# Altium PCB Constant Current Load V200.PcbDoc
Units mil, origin at the board's own origin, x right, y up, seen from the top; angles counter-clockwise.
Board outline 3149.61 x 1929.13 mil, 2 copper layers (Top Layer, Bottom Layer); 31 components, 18 nets, 87 pads, 7 vias.
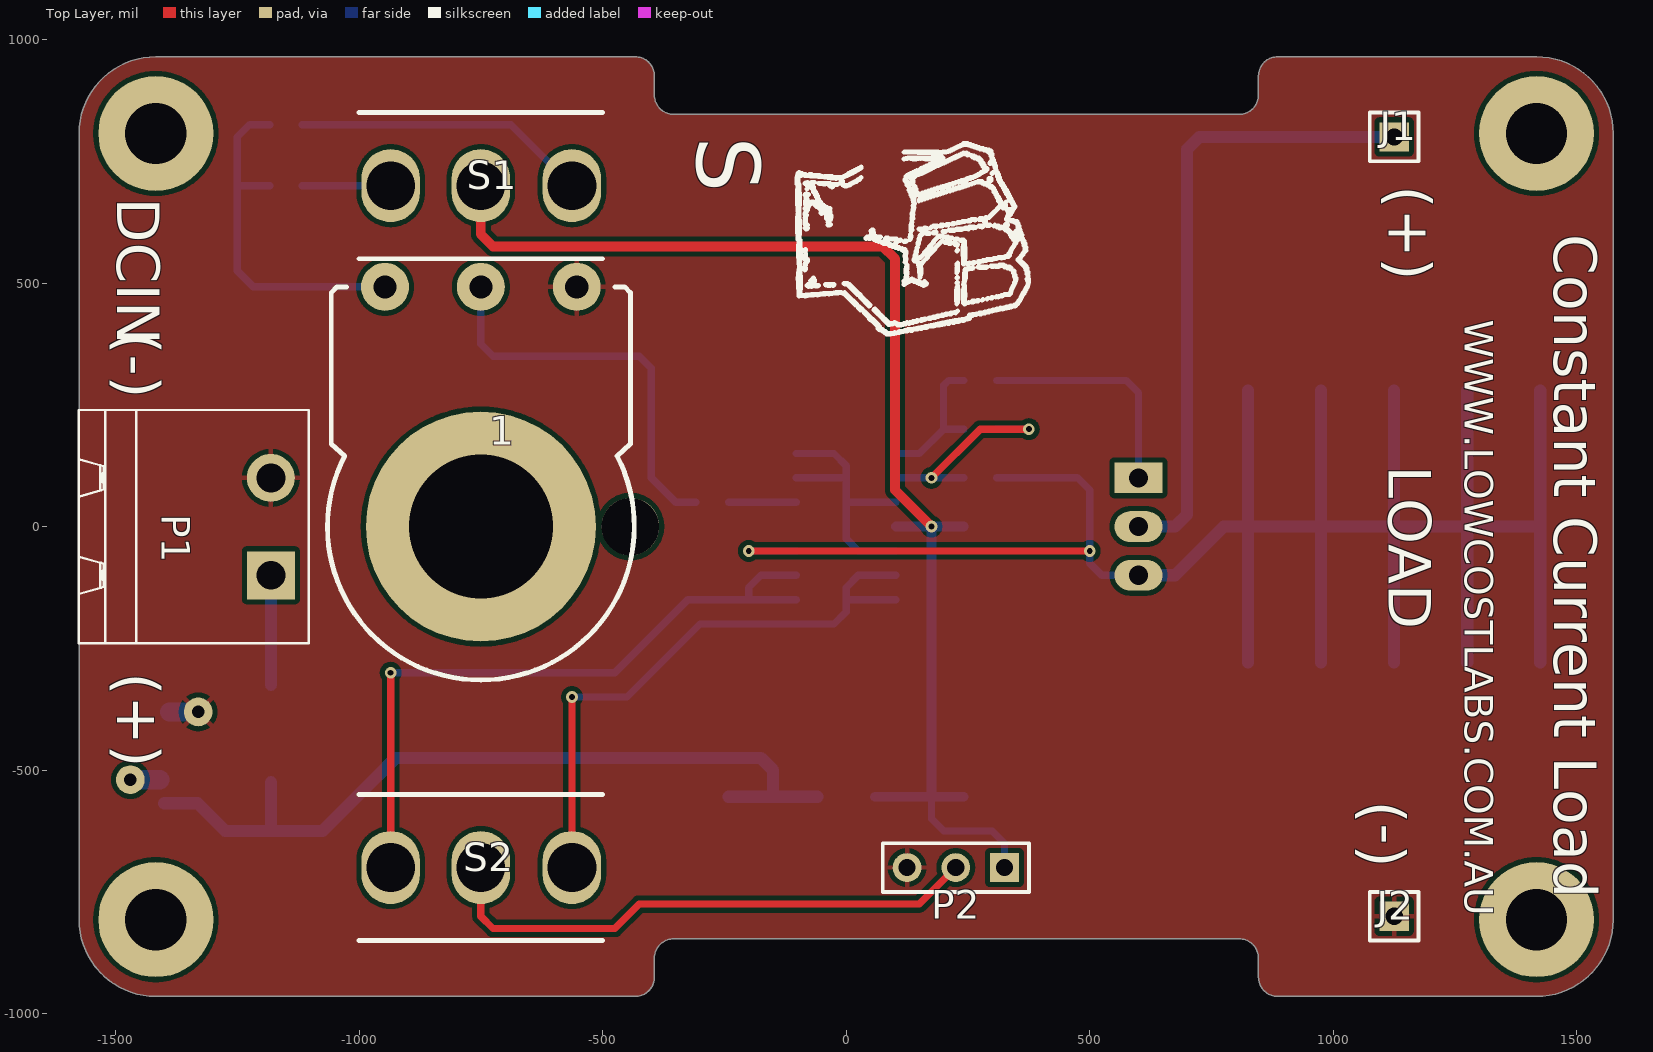
[diagram p0: Top Layer view]
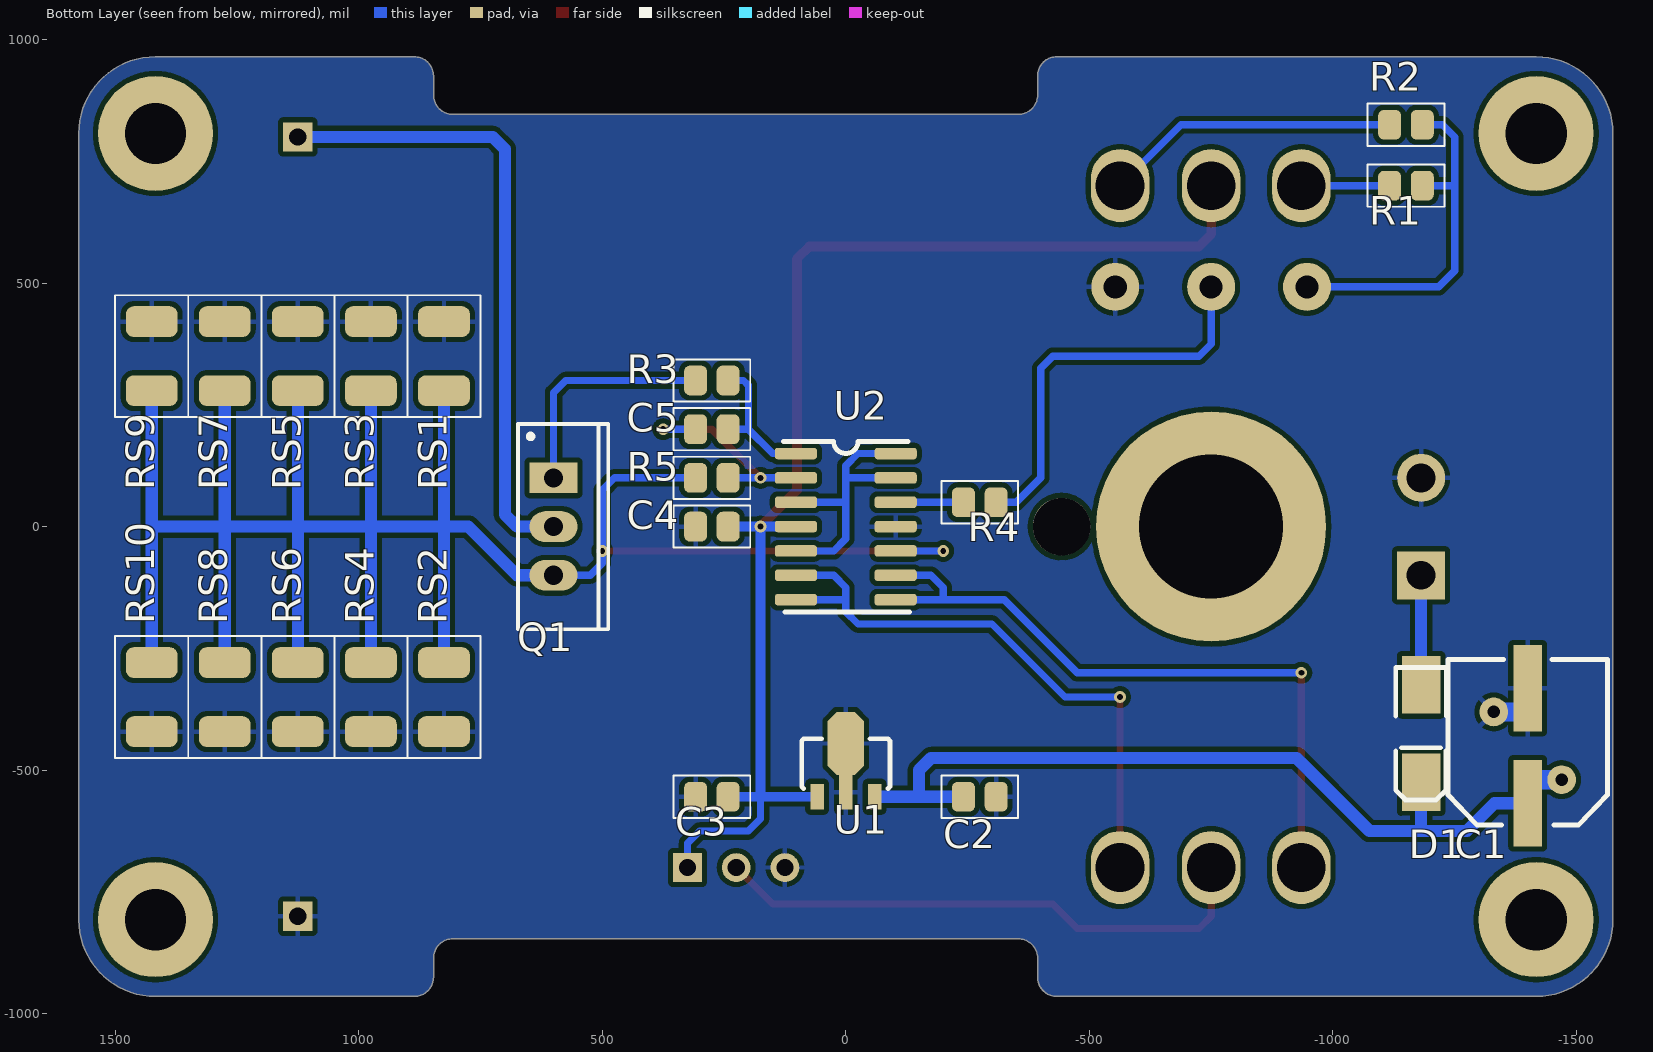
[diagram p1: Bottom Layer view, seen from below]

## Layer stack, top to bottom
Top Solder: solder mask 0.4, Solder Resist, Dk 3.5
Top Layer: signal copper 1.4
Dielectric1: dielectric 12.6, FR-4, Dk 4.8
Bottom Layer: signal copper 1.4
Bottom Solder: solder mask 0.4, Solder Resist, Dk 3.5

## Board outline
-1417.32,-964.57 -433.07,-964.57 ccw(c-433.07,-925.2) -393.7,-925.2 -393.7,-885.83 cw(c-354.33,-885.83) -354.33,-846.46 807.09,-846.46 cw(c807.09,-885.83) 846.46,-885.83 846.46,-925.2 ccw(c885.83,-925.2) 885.83,-964.57 1417.32,-964.57 ccw(c1417.32,-807.09) 1574.8,-807.09 1574.8,807.09 ccw(c1417.32,807.09) 1417.32,964.57 885.83,964.57 ccw(c885.83,925.2) 846.46,925.2 846.46,885.83 cw(c807.09,885.83) 807.09,846.46 -354.33,846.46 cw(c-354.33,885.83) -393.7,885.83 -393.7,925.2 ccw(c-433.07,925.2) -433.07,964.57 -1417.32,964.57 ccw(c-1417.32,807.09) -1574.8,807.09 -1574.8,-807.09 ccw(c-1417.32,-807.09)

## Design rules (kind name [scope] priority, off if disabled: settings)
Clearance [All] p1: gap=10 ignorepadtopadclearanceinfootprint=FALSE except(0: Arc-Hole Track-Hole SMDPad-Hole THPad-Hole Via-Hole Fill-Hole Poly-Hole Region-Hole Text-Hole)
PolygonConnect [All] p1: connectstyle=Relief reliefconductorwidth=10 reliefentries=4 polygonreliefangle="90 Angle" airgapwidth=10
RoomDefinition "Constant Current" [InComponentClass('Constant Current')] p1: confinementstyle=ConfineIn formatcopy=TRUE lockcomponents=FALSE outline -1574.8,-964.57 1574.8,-964.57 1574.8,964.57 -1574.8,964.57
RoutingVias [All] p1: holewidth=12 width=24 viastyle="Through Hole" minholewidth=12 minwidth=24 maxholewidth=28 maxwidth=50
SolderMaskExpansion [All] p1: expansion=4
Width [All] p1: maxlimit=100 minlimit=10 preferedwidth=10
30 further rules are at their usual default settings.

## Components (designator, comment, footprint, x,y, rotation, side; value= is the part's Value field where it differs from the comment)
1 "I ADJUST" "PCB POT 17MM" -750,0 r180 top
C1 "10uF" "CAP E CASE" -1400,-450 r270 bottom
C2 "100nF" "CAP 0805" -275,-554.63 r180 bottom
C3 "100nF" "CAP 0805" 275,-554.62 r0 bottom
C4 "100nF" "CAP 0805" 275,0 r180 bottom
C5 "100nF" "CAP 0805" 275,200 r0 bottom
D1 "S1M" DO-214AC -1181.1,-425 r270 bottom
J1 "Socket" TP 1125,800 r0 top
J2 "Socket" TP 1125,-800 r0 top
P1 "PSU IN" "5.08mm HEADER 2 Way RA- With Socket" -1181.1,-100 r90 top
P2 "Header 3" HDR1X3 325,-700 r180 top
Q1 "MTP3055" TO-220AB 600,0 r270 bottom
R1 "0805" "RES 0805" -1150,700 r180 bottom value=10k
R2 "0805" "RES 0805" -1150,825 r180 bottom value=90k
R3 "0805" "RES 0805" 275,300 r0 bottom value=100R
R4 "0805" "RES 0805" -275,50 r0 bottom value=100R
R5 "0805" "RES 0805" 275,100 r0 bottom value=10k
RS1 "0805" "RES 1210" 825,350 r270 bottom value=10R
RS2 "0805" "RES 1210" 825,-350 r270 bottom value=10R
RS3 "0805" "RES 1210" 975,350 r270 bottom value=10R
RS4 "0805" "RES 1210" 975,-350 r270 bottom value=10R
RS5 "0805" "RES 1210" 1125,350 r270 bottom value=10R
RS6 "0805" "RES 1210" 1125,-350 r270 bottom value=10R
RS7 "0805" "RES 1210" 1275,350 r270 bottom value=10R
RS8 "0805" "RES 1210" 1275,-350 r270 bottom value=10R
RS9 "0805" "RES 1210" 1425,350 r270 bottom value=10R
RS10 "0805" "RES 1210" 1425,-350 r270 bottom value=10R
S1 "SW-SPDT" "SPDT MINI TOGGLE (BOARD MOUNT)" -750,700 r270 top
S2 "SW-SPDT" "SPDT MINI TOGGLE (BOARD MOUNT)" -750,-700 r270 top
U1 "MC7805ACT" SOT89 0,-500 r180 bottom value=LM7805ACT
U2 "LM324AN" SOIC-14 0,0 r270 bottom value=LM324

## Footprints (in the part's own frame and the unit in brackets; to place one, negate y for a bottom-side part, rotate by r counter-clockwise, add the part's x,y. Pads: shape width x height; smd on the part's side, far side on the other; paste and mask are expansions set on the pad)
"5.08mm HEADER 2 Way RA- With Socket" [mm] "PHOENIX CONTACT 1757019 & 1759017"
  rect 2.5x2.5 hole 1.5: 1(0,0)
  round 2.5 hole 1.5: 2(5.08,0)
  silkscreen extent -3.54,-1.98 8.62,10.02, body extent -2.54,-2.01 7.67,19.18, height 15.02
"CAP 0805" [mm]
  rrect50% 1.2x1.55 smd: 1(-0.85,0) 2(0.85,0)
  silkscreen extent -2,-1.1 2,1.1, body extent -1.25,-0.62 1.25,0.62, height 0.8
"CAP E CASE" [mm]
  round 1.5 hole 0.65: 1(1.768,1.768) 2(-1.768,-1.768)
  rect 4.5x1.5 smd: 1(3,0) 2(-3,0)
  Top Layer lines w1: 1.768,1.768 1.768,0.232 ; -1.768,-0.268 -1.768,-1.768
  silkscreen extent -4.5,-4.15 4.13,4.15, body extent -4.5,-4.15 4.5,4.15, height 6.2
DO-214AC [mm]
  rect 3x2 smd: 1(-2.54,0) 2(2.54,0)
  silkscreen extent -3.45,-1.32 3.45,1.32, body extent -2,-1 2,1, height 1.55
HDR1X3 [mm] "Connector; Header; 3 Position"
  rect 1.5x1.5 hole 0.9: 1(0,0)
  round 1.5 hole 0.9: 2(2.54,0) 3(5.08,0)
  silkscreen extent -1.27,-1.27 6.35,1.27
"PCB POT 17MM" [mm]
  round 2.5 hole 1.2: 1(-5,-12.5) 2(0,-12.5) 3(5,-12.5)
  round 3 hole 3: 4(-7.8,0)
  round 12 hole 7.5: MOUNT(0,0)
  silkscreen extent -8,-12.5 8,8, body extent -7.87,-17 7.88,7.62, height 6.87
"RES 0805" [mm]
  rrect50% 1.2x1.55 smd: 1(-0.85,0) 2(0.85,0)
  silkscreen extent -2,-1.1 2,1.1, body extent -1.25,-0.62 1.25,0.62, height 0.8
"RES 1210" [mm]
  rrect50% 1.6x2.7 smd: 1(-1.8,0) 2(1.8,0)
  silkscreen extent -3.18,-1.91 3.18,1.91, body extent -2,-1.24 2,1.24, height 1.72
SOIC-14 [mm] "SOIC-14  NARROW BODY"
  rrect50% 0.6x2.2 smd: 1(-3.81,-2.6) 2(-2.54,-2.6) 3(-1.27,-2.6) 4(0,-2.6) 5(1.27,-2.6) 6(2.54,-2.6) 7(3.81,-2.6) 8(3.81,2.6) 9(2.54,2.6) 10(1.27,2.6) 11(0,2.6) 12(-1.27,2.6) 13(-2.54,2.6) 14(-3.81,2.6)
  silkscreen extent -4.45,-3.25 4.45,3.33, body extent -4.4,-3 4.4,3, height 1.7
SOT89 [mm]
  rect 0.7x1.35 smd: 1(1.5,-1.388) 3(-1.5,-1.388)
  rect 0.7x1.8 smd: 2(0,-1.163)
  oct 1.9x3.3 smd: 2(0,1.388)
  silkscreen extent -2.3,-0.97 2.3,1.63, body extent -2.3,-1.91 2.3,2.34, height 1.62
"SPDT MINI TOGGLE (BOARD MOUNT)" [mil]
  oval 150x120 hole 100: 1(0,187) 2(0,0) 3(0,-185.26)
  silkscreen extent -150,-250 150,250, body extent -157,-260 157,260, height 1296
TO-220AB [mm] "TO, Thru-Hole, Vertical, Heatsink Mounted; 3 In-Line Leads; Pitch 2.54 mm"
  rect 1.6x2.5 hole 1: 1(-2.54,0)
  oval 1.6x2.5 hole 1: 2(0,0) 3(2.54,0)
  silkscreen extent -5.35,-1.85 5.35,2.85, body extent -5.4,-1.9 5.4,2.9, height 19.3
TP [mil] "Connector; Header; 2 Position"
  rect 60x60 hole 35.43: 1(0,0)
  silkscreen extent -50,-50 50,50

## Part data
1: library part "Header 3", "Header, 3-Pin", LatestRevisionDate=17-Jul-2002, LatestRevisionNote="Re-released for DXP Platform.", Publisher="Altium Limited"
C1: library part "Cap Pol1", "Polarized Capacitor (Radial)"
C2 C3: library part CAP, "CAPACITOR SMD 0603", Manufacturer=Murata, Manufacturer Part No.=GCM188R71C104KA37D, Mouser Part no.=81-GCM188R71C104KA7D, Web link=http://au.mouser.com/ProductDetail/Murata/GCM188R71C104KA37D/?qs=aEuGZpxfbxWKAxwYn%252beTMg%3d%3d
C4 C5: library part Cap, "Capacitor", Manufacturer=YAEGO, Manufacturer Part No.=CC0603ZRY5V9BB104, Mouser Part no.=603-C0603ZRY5V9BB104, Supplier 1=Mouser, Supplier 2=Digi-Key, Supplier Part Number 1=603-C0603ZRY5V9BB104, Supplier Part Number 2=311-1343-2-ND, Web link=http://au.mouser.com/ProductDetail/Yageo/CC0603ZRY5V9BB104/?qs=AgBp2OyFlx%252bk1xe0tOfw5lSGBXIDidlPHbEeepmuVSw%3d
D1: library part DIODE, "DIODE, POWER", Manufacturer="Taiwan Semiconductor", Mouser Part no.=821-S1M, Manufacturer Part No.=S1M, Web link=http://au.mouser.com/ProductDetail/Taiwan-Semiconductor/S1M/?qs=sGAEpiMZZMtEwUVCuofpuOlSmRjzJonf%252bmrIm0%252bGbjE%3d
P1: library part "Header 2", "Header, 2-Pin", LatestRevisionDate=17-Jul-2002, LatestRevisionNote="Re-released for DXP Platform.", Publisher="Altium Limited"
P2: "Header, 3-Pin", LatestRevisionDate=17-Jul-2002, LatestRevisionNote="Re-released for DXP Platform.", Publisher="Altium Limited"
Q1: library part MOSFET-N4, "N-Channel MOSFET"
R1 R2 R3 R4 R5 RS1 RS2 RS3 RS4 RS5 RS6 RS7 RS8 RS9 RS10: library part Res2, "Resistor"
S1 S2: "SPDT Subminiature Toggle Switch, Right Angle Mounting, Vertical Actuation", ComponentLink1Description="Manufacturer Link", ComponentLink1URL=http://www.apem.com, DatasheetVersion=05-Dec-2000, LatestRevisionDate=17-Dec-2003, LatestRevisionNote="Schematic revised, PCB Footprint replaced.", PackageDescription="Switch; 4 Leads", PackageReference=TL36WW15050, Published=24-Mar-1999, Publisher="Altium Limited"
U1: "3-Terminal Positive Fixed Voltage Regulator", Manufacturer="Fairchild Semiconductor", Manufacturer Part No.=LM7805ACT, Mouser Part no.=512-LM7805ACT, Web link=http://au.mouser.com/ProductDetail/Fairchild-Semiconductor/LM7805ACT/?qs=VOMQJJE%252bBNlQknJDd4ZVLg%3d%3d
U2: "Quadruple Operational Amplifier", Manufacturer="ST MICRO", Mouser Part no.=511-LM324AN, Supplier Part Number 1=595-LM324AN, Manufacturer Part No.=LM324AN, Supplier 1=Mouser, Supplier 2=Digi-Key, Supplier Part Number 2=497-1579-5-ND, Web link=http://au.mouser.com/ProductDetail/STMicroelectronics/LM324AN/?qs=Aez0sHNrW%2fUytSAnJAKyV%252b8BIEGXhIFhom0MkRvP3bs%3d
J1 J2: LatestRevisionDate=17-Jul-2002, LatestRevisionNote="Re-released for DXP Platform.", Publisher="Altium Limited"

## Free pads (board coordinates)
  round 236.22 hole 125.98: 0(-1417.32,-807.09) 0(-1417.32,807.09) 0(1417.32,-807.09) 0(1417.32,807.09)

## Via types
v1: diameter 24, hole 12, Top Layer to Bottom Layer, 7 vias

## Nets (pads, with @x,y where several pads share a name; then routed paths per layer and width w, separated by ;. In a path a pad name is that pad's centre, name@x,y a point inside that pad or via, vN(x,y) a via of type N, cw(c..) or ccw(c..) an arc to the next point about the centre after c; other vN are vias at no path point)
AMPS: P2.2 S2.2 | length 1137.1
  Top Layer w15: S2.2 -750,-800 -725,-825 -475,-825 -425,-775 150,-775 P2.2
GND: 1.1 C1.2 C2.2 C3.2 C4.1 J2.1 P1.2 P2.3 RS1.1 RS2.2 RS3.1 RS4.2 RS5.1 RS6.2 RS7.1 RS8.2 RS9.1 RS10.2 U1.2 U2.11
HIGH: R1.1 S1.3 | length 181.3
  Bottom Layer w15: R1.1 S1.3
LOW: R2.1 S1.1 | length 605.3
  Bottom Layer w15: R2.1 -688,825 S1.1
Net1_2: 1.2 R4.1 | length 825.1
  Bottom Layer w15: 1.2 -750,375 -725,350 -425,350 -400,325 -400,100 -350,50 R4.1
Net1_3: 1.3 R1.2 R2.2 | length 735.2
  Bottom Layer w15: R1.2 -1250,700 ; R2.2 -1225,825 -1250,800 -1250,700 ; 1.3 -1217.13,492.13 -1250,525 -1250,700
NetC5_1: C5.1 R3.1 U2.1 | length 295.6
  Bottom Layer w15: U2.1 150,150 199.99,199.99 ; C5.1 199.99,199.99 ; R3.1 210,300 199.99,289.99 199.99,199.99
NetC5_2: C5.2 R5.1 U2.2 | length 447.1
  Top Layer w15: v1(175,100) 275,200 v1(375,200)
  Bottom Layer w15: U2.2 v1(175,100) R5.1 ; C5.2 v1(375,200)
NetJ1_1: J1.1 Q1.2 | length 1295.7
  Bottom Layer w25: Q1.2 675,0 700,25 700,775 725,800 J1.1
NetQ1_1: Q1.1 R3.2 | length 476.9
  Bottom Layer w15: R3.2 575,300 600,275 Q1.1
NetR4_2: R4.2 U2.12 | length 139.2
  Bottom Layer w15: R4.2 U2.12
SENSE: Q1.3 R5.2 RS1.2 RS2.1 RS3.2 RS4.1 RS5.2 RS6.1 RS7.2 RS8.1 RS9.2 RS10.1 U2.10 | length 4917.6
  Top Layer w15: v1(-200,-50) v1(500,-50)
  Bottom Layer w15: v1(-200,-50) U2.10 ; R5.2 475,100 500,75 v1(500,-50) 500,-75 525,-100 Q1.3
  Bottom Layer w25: Q1.3 675,-100 775,0 825,0 ; RS2.1 825,0 ; RS1.2 825,0 ; RS4.1 975,0 ; RS3.2 975,0 ; RS6.1 1125,0 ; RS5.2 1125,0 ; RS8.1 1275,0 ; RS7.2 1275,0 ; RS10.1 1425,0 ; RS9.2 1425,0 ; 825,0 975,0 ; 975,0 1125,0 ; 1125,0 1275,0 ; 1275,0 1425,0
"SENSE MONITOR": S2.3 U2.8 U2.9 | length 1428
  Top Layer w15: S2.3 v1(-935.26,-300)
  Bottom Layer w15: v1(-935.26,-300) -475,-300 -325,-150 -200,-150 ; U2.8 -200,-150 ; U2.9 -175,-100 -200,-125 -200,-150
SET: U2.3 U2.5 U2.13 U2.14 | length 580.2
  Bottom Layer w15: U2.13 0,100 ; U2.14 -25,150 0,125 0,100 ; U2.5 25,-50 0,-25 0,50 ; U2.3 0,50 ; 0,50 0,100
"SET MONITOR": S2.1 U2.6 U2.7 | length 1250.6
  Top Layer w15: S2.1 v1(-563,-350)
  Bottom Layer w15: v1(-563,-350) -450,-350 -300,-200 -25,-200 0,-175 0,-150 ; U2.7 0,-150 ; U2.6 25,-100 0,-125 0,-150
V+: C1.1 C2.1 D1.2 U1.1 | length 1681.1
  Bottom Layer w25: C1.1@-1400,-568.11 -1331.89,-568.11 -1275,-625 -1175,-625 ; D1.2 -1181.1,-618.9 -1175,-625 ; C2.1 U1.1 ; -150,-550 -150,-500 -175,-475 -925,-475 -1075,-625 -1175,-625
VCC: C3.1 C4.2 P2.1 S1.2 U1.3 U2.4 | length 2694.1
  Top Layer w20: S1.2 -750,600 -725,575 75,575 100,550 100,75.01 v1(175,0.01)
  Bottom Layer w15: 175,-554.63 175,-600 200,-625 300,-625 325,-650 P2.1
  Bottom Layer w20: U1.3 175,-554.63 ; U2.4 v1(175,0.01) ; C3.1 175,-554.63 ; C4.2 v1(175,0.01) ; 175,-554.63 v1(175,0.01)
VIN: D1.1 P1.1 | length 225
  Bottom Layer w25: D1.1 P1.1
pads on no net: 1.4 1.MOUNT

## Polygon pours and split planes (outlines as drawn)
GND on Bottom Layer "Mechanical 3-No Net" (solid, remove dead copper, pour order 2): -1417.32,-964.57 -433.07,-964.57 ccw(c-433.07,-925.2) -393.7,-925.2 -393.7,-885.83 cw(c-354.33,-885.83) -354.33,-846.46 807.09,-846.46 cw(c807.09,-885.83) 846.46,-885.83 846.46,-925.2 ccw(c885.83,-925.2) 885.83,-964.57 1417.32,-964.57 ccw(c1417.32,-807.09) 1574.8,-807.09 1574.8,807.09 ccw(c1417.32,807.09) 1417.32,964.57 885.83,964.57 ccw(c885.83,925.2) 846.46,925.2 846.46,885.83 cw(c807.09,885.83) 807.09,846.46 -354.33,846.46 cw(c-354.33,885.83) -393.7,885.83 -393.7,925.2 ccw(c-433.07,925.2) -433.07,964.57 -1417.32,964.57 ccw(c-1417.32,807.09) -1574.8,807.09 -1574.8,-807.09 ccw(c-1417.32,-807.09)
GND on Top Layer "Mechanical 3-No Net" (solid, remove dead copper, pour order 4): -1417.32,-964.57 -433.07,-964.57 ccw(c-433.07,-925.2) -393.7,-925.2 -393.7,-885.83 cw(c-354.33,-885.83) -354.33,-846.46 807.09,-846.46 cw(c807.09,-885.83) 846.46,-885.83 846.46,-925.2 ccw(c885.83,-925.2) 885.83,-964.57 1417.32,-964.57 ccw(c1417.32,-807.09) 1574.8,-807.09 1574.8,807.09 ccw(c1417.32,807.09) 1417.32,964.57 885.83,964.57 ccw(c885.83,925.2) 846.46,925.2 846.46,885.83 cw(c807.09,885.83) 807.09,846.46 -354.33,846.46 cw(c-354.33,885.83) -393.7,885.83 -393.7,925.2 ccw(c-433.07,925.2) -433.07,964.57 -1417.32,964.57 ccw(c-1417.32,807.09) -1574.8,807.09 -1574.8,-807.09 ccw(c-1417.32,-807.09)

## Silkscreen, mask and mechanical layers (free items; w line width, h text height)
Top Overlay:
  drawing of 3568 lines, arcs and shapes, not listed
  text "S" at -350,800 h225 r270
  text "(+)" at 1084.96,700 h150 r270
  text "DCIN" at -1525,675 h150 r270
  text "Constant Current Load" at 1425,600 h150 r270
  text "WWW.LOWCOSTLABS.COM.AU" at 1250,425 h100 r270
  text "(-)" at -1525,400 h150 r270
  text "LOAD" at 1084.96,125 h150 r270
  text "(+)" at -1525,-300 h150 r270
  text "(-)" at 1165.04,-700 h150 r90
Mechanical 1:
  the board outline again, w10
Mechanical 3:
  lines w10: -225,-700 -750,-700 -750,700 -225,700 ; 1200,-500 1200,500